# Altium PCB CirclePCBV2_3inDia.PcbDoc
Units mil, origin at the board's own origin, x right, y up, seen from the top; angles counter-clockwise.
Board outline 3610.03 x 3609.98 mil, 2 copper layers (Top Layer, Bottom Layer); 9 components, 31 nets, 90 pads, 10 vias.
Unrouted connection lines stored in the file: 51.
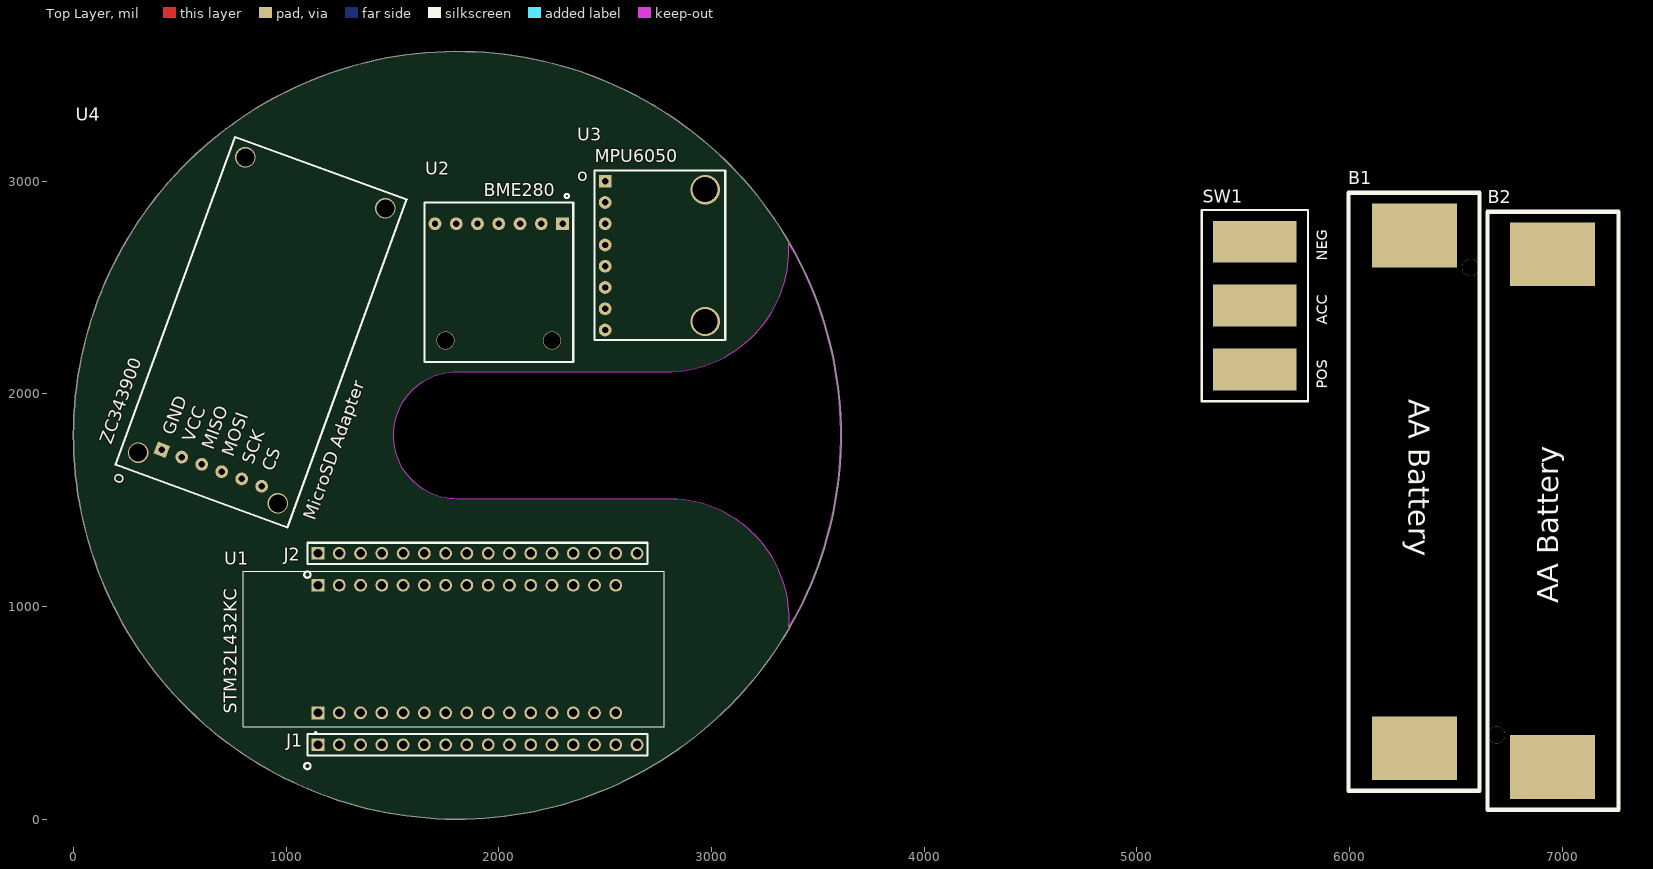
[diagram p0: Top Layer view]
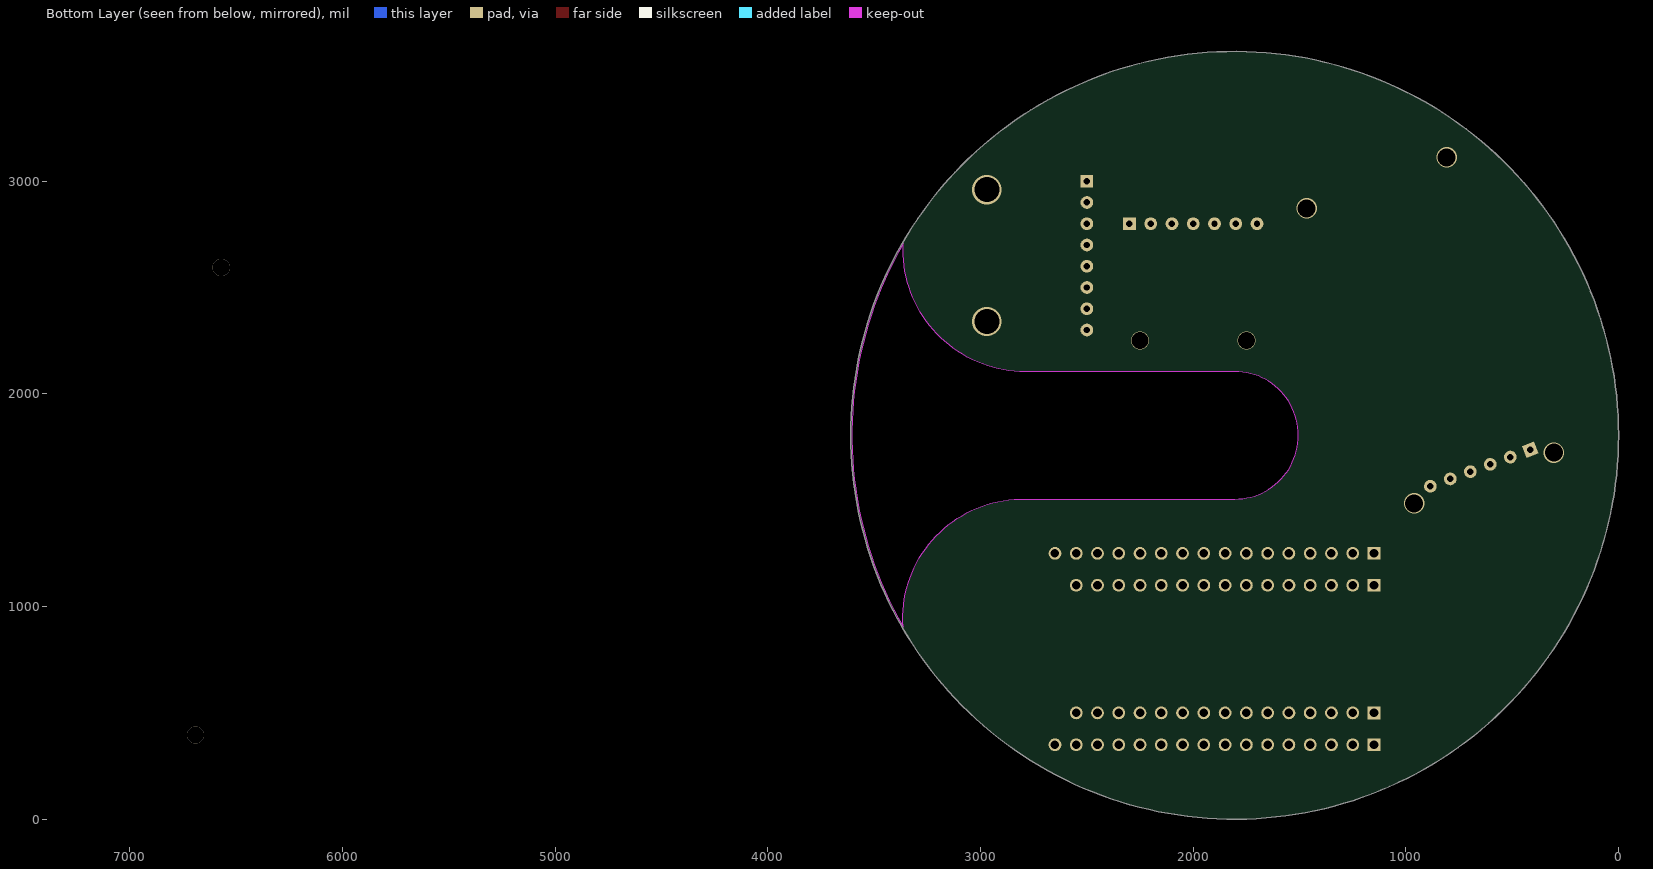
[diagram p1: Bottom Layer view, seen from below]

## Layer stack, top to bottom
Top Solder: solder mask 0.4, Solder Resist, Dk 3.5
Top Layer: signal copper 1.4
Dielectric 1: dielectric 12.6, FR-4, Dk 4.8
Bottom Layer: signal copper 1.4
Bottom Solder: solder mask 0.4, Solder Resist, Dk 3.5

## Board outline
3368.14,902.4 cw(c1805,1805) 3368.19,2707.51 cw(c1805,1805) 3610.01,1805 cw(c1805,1805) 3368.33,902.74 cw(c3363.89,905.07)
cut-out: 1805,1505 cw(c1805,1805) 1805,2105 2815,2105 ccw(c2789.42,2679.42) 3363.85,2705 cw(c1805,1805) 3363.85,905 3363.89,905.07 ccw(c2802.5,942.5) 2815,1505

## Design rules (kind name [scope] priority, off if disabled: settings)
Clearance [All] p1: gap=10 ignorepadtopadclearanceinfootprint=FALSE except(0: Arc-Hole Track-Hole SMDPad-Hole THPad-Hole Via-Hole Fill-Hole Poly-Hole Region-Hole Text-Hole)
PolygonConnect [All] p1: connectstyle=Relief reliefconductorwidth=10 reliefentries=4 polygonreliefangle="90 Angle" airgapwidth=10
RoomDefinition STM32 [InComponentClass('STM32')] p1: confinementstyle=ConfineOut formatcopy=TRUE lockcomponents=FALSE outline 5280,6345 6515,6345 6515,8540 5280,8540
RoomDefinition Sensors [InComponentClass('Sensors')] p2: confinementstyle=ConfineOut formatcopy=TRUE lockcomponents=FALSE outline 5300,5195 6785,5195 6785,6220 5300,6220
RoomDefinition SD [InComponentClass('SD')] p3: confinementstyle=ConfineOut formatcopy=TRUE lockcomponents=FALSE outline 5315,3120 6445,3120 6445,5125 5315,5125
RoomDefinition Power [InComponentClass('Power')] p4: confinementstyle=ConfineOut formatcopy=TRUE lockcomponents=FALSE outline 5290,30 7285,30 7285,2975 5290,2975
RoutingVias [All] p1: holewidth=28 width=50 viastyle="Through Hole" minholewidth=28 minwidth=50 maxholewidth=28 maxwidth=50
SolderMaskExpansion [All] p1: expansion=4 istentingtop=FALSE
Width [All] p1: maxlimit=10 minlimit=10 preferedwidth=10
30 further rules are at their usual default settings.

## Classes and differential pairs
net class SD_SPI[3..0]: SD_SPI0 SD_SPI1 SD_SPI2 SD_SPI3
net class MPU6050_I2C[1..0]: MPU6050_I2C0 MPU6050_I2C1
net class BME280_SPI[3..0]: BME280_SPI0 BME280_SPI1 BME280_SPI2 BME280_SPI3
component class STM32: J1 J2 U1
component class Sensors: U2 U3
component class SD: U4
component class Power: B1 B2 SW1

## Components (designator, comment, footprint, x,y, rotation, side; value= is the part's Value field where it differs from the comment)
B1 "BatteryHolder_AA" BatteryHolder_AA 6305,2745 r270 top
B2 "BatteryHolder_AA" BatteryHolder_AA 6955,245 r90 top
J1 "16pin-MF-Connector" 16pin-MF-Connector 1150,350 r90 top
J2 "16pin-MF-Connector" 16pin-MF-Connector 1150,1250 r90 top
SW1 "RR3130Switch" RR3130Switch 5555,2115 r90 top
U1 "STM32L432KC" STM32L432KC 788.39,425 r90 top
U2 "BME280" BME280 2300,2800 r180 top
U3 "MPU6050" MPU6050 2500,3000 r0 top
U4 "ZC343900" ZC343900 415.08,1736.81 r70 top

## Footprints (in the part's own frame and the unit in brackets; to place one, negate y for a bottom-side part, rotate by r counter-clockwise, add the part's x,y. Pads: shape width x height; smd on the part's side, far side on the other; paste and mask are expansions set on the pad)
16pin-MF-Connector [mil]
  rect 60x60 hole 40.16: 1(0,0)
  round 60 hole 40.16: 2(0,-100) 3(0,-200) 4(0,-300) 5(0,-400) 6(0,-500) 7(0,-600) 8(0,-700) 9(0,-800) 10(0,-900) 11(0,-1000) 12(0,-1100) 13(0,-1200) 14(0,-1300) 15(0,-1400) 16(0,-1500)
  silkscreen extent -115,-1550 50,65
BatteryHolder_AA [mil]
  rect 300x400 smd: 1(0,0) 2(2411,0)
  silkscreen extent -200,-310 2611,306
BME280 [mil]
  rect 60x60 hole 30: 1(0,0)
  round 60 hole 30: 2(100,0) 3(200,0) 4(300,0) 5(400,0) 6(500,0) 7(600,0)
  silkscreen extent -50,-140 650,650
MPU6050 [mil]
  rect 60x60 hole 30: 1(0,0)
  round 60 hole 30: 2(0,-100) 3(0,-200) 4(0,-300) 5(0,-400) 6(0,-500) 7(0,-600) 8(0,-700)
  silkscreen extent -50,-748 565,50
RR3130Switch [mm] "SWITCH ROCKER SPST 10A 125V"
  rect 5x10 smd: 1(0,0) 2(7.62,0) 3(15.24,0)
  silkscreen extent -3.81,-6.35 19.05,6.35
STM32L432KC [mm]
  rect 1.53x1.53 hole 1.02: CN3_1(1.905,-9.185) CN4_1(17.145,-9.185)
  round 1.53 hole 1.02: CN3_2(1.905,-11.725) CN3_3(1.905,-14.265) CN3_4(1.905,-16.805) CN3_5(1.905,-19.345) CN3_6(1.905,-21.885) CN3_7(1.905,-24.425) CN3_8(1.905,-26.965) CN3_9(1.905,-29.505) CN3_10(1.905,-32.045) CN3_11(1.905,-34.585) CN3_12(1.905,-37.125) CN3_13(1.905,-39.665) CN3_14(1.905,-42.205) CN3_15(1.905,-44.745) CN4_2(17.145,-11.725) CN4_3(17.145,-14.265) CN4_4(17.145,-16.805) CN4_5(17.145,-19.345) CN4_6(17.145,-21.885) CN4_7(17.145,-24.425) CN4_8(17.145,-26.965) CN4_9(17.145,-29.505) CN4_10(17.145,-32.045) CN4_11(17.145,-34.585) CN4_12(17.145,-37.125) CN4_13(17.145,-39.665) CN4_14(17.145,-42.205) CN4_15(17.145,-44.745)
  silkscreen extent -0.57,-50.54 18.79,-0.26
ZC343900 [mil] "MicroSD Adapter"
  rect 60x60 hole 30: 1(0,0)
  round 60 hole 30: 2(0,-100) 3(0,-200) 4(0,-300) 5(0,-400) 6(0,-500)
  silkscreen extent -140,-680 1500,180

## Part data
B1 B2: "Keystone Electronics 1088"
SW1: "SWITCH ROCKER SPST 10A 125V"
U4: "MicroSD Adapter"

## Via types
v1: diameter 96.46, hole 84.65, Top Layer to Bottom Layer, 4 vias
v2: diameter 137.8, hole 118.11, Top Layer to Bottom Layer, 2 vias
v3: diameter 85, hole 80, Top Layer to Bottom Layer, 2 vias
v4: diameter 80, hole 80, Top Layer to Bottom Layer, 2 vias

## Nets (pads, with @x,y where several pads share a name; then routed paths per layer and width w, separated by ;. In a path a pad name is that pad's centre, name@x,y a point inside that pad or via, vN(x,y) a via of type N, cw(c..) or ccw(c..) an arc to the next point about the centre after c; other vN are vias at no path point)
3V3: J2.14 SW1.1 U1.CN4_14
5V: J2.4 U1.CN4_4 U2.1 U3.1 U4.2
BME280_SPI0: J2.15 U1.CN4_15 U2.4
BME280_SPI1: J1.15 U1.CN3_15 U2.5
BME280_SPI2: J1.14 U1.CN3_14 U2.6
BME280_SPI3: J1.8 U1.CN3_8 U2.7
CN3_3: J1.3 U1.CN3_3
CN3_5: J1.5 U1.CN3_5
CN3_6: J1.6 U1.CN3_6
CN3_7: J1.7 U1.CN3_7
CN3_9: J1.9 U1.CN3_9
CN3_10: J1.10 U1.CN3_10
CN3_11: J1.11 U1.CN3_11
CN3_12: J1.12 U1.CN3_12
CN3_13: J1.13 U1.CN3_13
CN4_1: J2.1 U1.CN4_1
CN4_3: J2.3 U1.CN4_3
CN4_5: J2.5 U1.CN4_5
CN4_9: J2.9 U1.CN4_9
CN4_10: J2.10 U1.CN4_10
CN4_12: J2.12 U1.CN4_12
CN4_13: J2.13 U1.CN4_13
GND: B2.2 J1.4 J2.2 U1.CN3_4 U1.CN4_2 U2.3 U3.2 U4.1
MPU6050_I2C0: J1.1 U1.CN3_1 U3.3
MPU6050_I2C1: J1.2 U1.CN3_2 U3.4
NetB1_1: B1.1 SW1.3
NetB1_2: B1.2 B2.1
SD_SPI0: J2.11 U1.CN4_11 U4.6
SD_SPI1: J2.8 U1.CN4_8 U4.5
SD_SPI2: J2.7 U1.CN4_7 U4.3
SD_SPI3: J2.6 U1.CN4_6 U4.4
pads on no net: J1.16 J2.16 SW1.2 U2.2 U3.5 U3.6 U3.7 U3.8
copper on no net:
  other v1: 961.79,1484.61 304.01,1724.03 1466.74,2871.95 808.96,3111.37
  other v2: 2970,2340 2970,2960
  other v3: 1750,2250 2250,2250
  other v4: 6690,395 6570,2595

## Silkscreen, mask and mechanical layers (free items; w line width, h text height)
Mechanical 1:
  lines w10: 3363.89,905.07 ccw(c2802.5,942.5) 2815,1505 1805,1505 cw(c1805,1805) 1805,2105 2815,2105 ccw(c2789.42,2679.42) 3363.85,2705 ; 3363.85,2705 ccw(c1805,1805) 3363.85,905 ccw(c1805,1805) 3363.85,2705

## Text inside footprints (layer, text, board x,y; h text height)
B1: Top Overlay "AA Battery" at 6278.32,1975 h100 r270
B2: Top Overlay "AA Battery" at 6981.68,1015 h100 r90
SW1: Top Overlay "POS" at 5895,2025 h50 r90; Top Overlay "NEG" at 5895,2625 h50 r90; Top Overlay "ACC" at 5895,2325 h50 r90
U3: Top Overlay "o" at 2370,3000 h60
U4: Top Overlay "MicroSD Adapter" at 1133.5,1400.83 h60 r70; Top Overlay "CS" at 940.48,1630.71 h60 r70; Top Overlay "SCK" at 846.51,1664.91 h60 r70; Top Overlay "MOSI" at 752.54,1699.12 h60 r70; Top Overlay "MISO" at 658.57,1733.32 h60 r70; Top Overlay "VCC" at 564.6,1767.52 h60 r70; Top Overlay "GND" at 470.63,1801.72 h60 r70; Top Overlay "o" at 227.07,1571.12 h60 r70